# Altium PCB RF Waveform Generator Layout.PcbDoc
Units mil, origin at the board's own origin, x right, y up, seen from the top; angles counter-clockwise.
Board outline 6000 x 4000 mil, 2 copper layers (Top Layer, Bottom Layer); 109 components, 67 nets, 443 pads, 0 vias.
Unrouted connection lines stored in the file: 226.
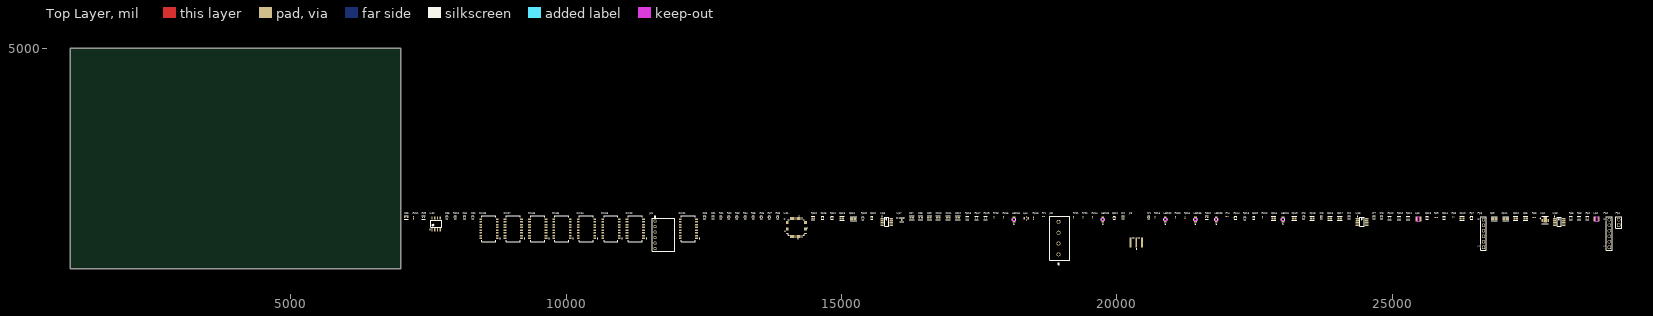
[diagram p0: Top Layer view]
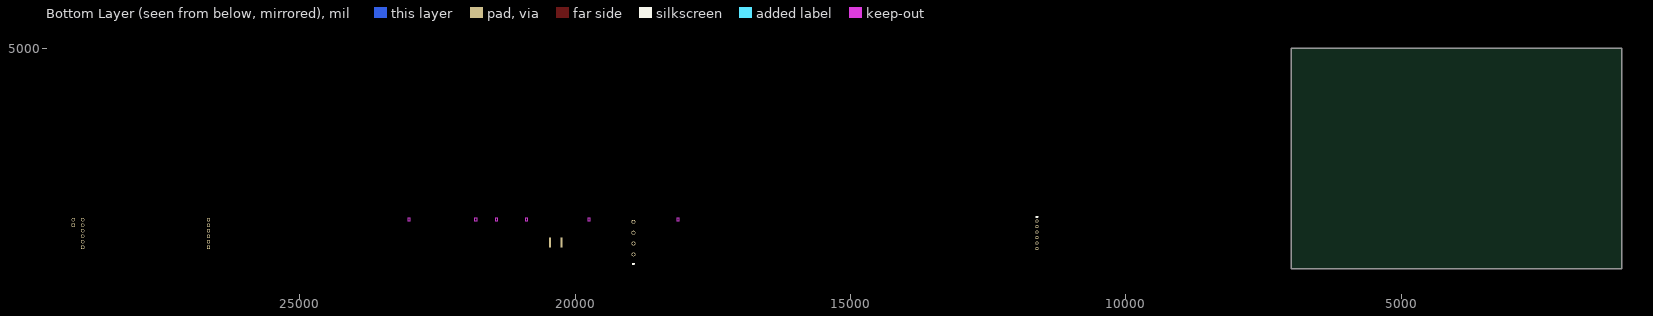
[diagram p1: Bottom Layer view, seen from below]

## Layer stack, top to bottom
Top Solder: solder mask 0.4, Solder Resist, Dk 3.5
Top Layer: signal copper 1.4
Dielectric 1: dielectric 12.6, FR-4, Dk 4.8
Bottom Layer: signal copper 1.4
Bottom Solder: solder mask 0.4, Solder Resist, Dk 3.5

## Board outline
1000,1000 7000,1000 7000,5000 1000,5000

## Design rules (kind name [scope] priority, off if disabled: settings)
Clearance [All] p1: gap=10 ignorepadtopadclearanceinfootprint=FALSE
PolygonConnect [All] p1: connectstyle=Relief reliefconductorwidth=10 reliefentries=4 polygonreliefangle="90 Angle" airgapwidth=10
RoutingVias [All] p1: holewidth=28 width=50 viastyle="Through Hole" minholewidth=28 minwidth=50 maxholewidth=28 maxwidth=50
SolderMaskExpansion [All] p1: expansion=4 istentingtop=FALSE
SupplyNets "Schematic Supply Nets_5" [InNet('Vopamp')] p1: voltage=0.000
SupplyNets "Schematic Supply Nets_4" [InNet('Vdigital')] p2: voltage=0.000
SupplyNets "Schematic Supply Nets_3" [InNet('Vout')] p3: voltage=0.000
SupplyNets "Schematic Supply Nets_2" [InNet('VCC')] p4: voltage=0.000
SupplyNets "Schematic Supply Nets_1" [InNet('+20')] p5: voltage=0.000
SupplyNets "Schematic Supply Nets" [InNet('GND')] p6: voltage=0.000
Width [All] p1: maxlimit=10 minlimit=10 preferedwidth=10
30 further rules are at their usual default settings.

## Components (designator, comment, footprint, x,y, rotation, side; value= is the part's Value field where it differs from the comment)
Cd1 "0.1uF" FP-CC0402-MFG 12665,1935 r0 top value="100 nF"
Cd2 "0.1uF" FP-CC0402-MFG 8305,1935 r0 top value="100 nF"
Cd3 "0.1uF" FP-CC0402-MFG 12515,1935 r0 top value="100 nF"
Cd4 "0.1uF" FP-CC0402-MFG 8155,1935 r0 top value="100 nF"
Cd5 "0.1uF" FP-CC0402-MFG 7835,1935 r0 top value="100 nF"
Cd6 "1.5nF" FP-CGA3E-0_3-0_1-MFG 7100,1930 r0 top
Cd7 "4.7uF" FP-GRM188-0_2-IPC_C 16275,1925 r0 top
Cd8 "4.7uF" FP-GRM188-0_2-IPC_C 16435,1925 r0 top
Cd9 "4.7uF" FP-GRM188-0_2-IPC_C 16595,1925 r0 top
Cd10 "4.7uF" FP-GRM188-0_2-IPC_C 16755,1925 r0 top
Cd11 "4.7uF" FP-GRM188-0_2-IPC_C 16935,1925 r0 top
Cd12 "4.7uF" FP-GRM188-0_2-IPC_C 17110,1925 r0 top
Cp5 "10uF" FP-GRM188-0_2-IPC_C 27420,1915 r0 top
Cp9 "4.7 uF" FP-GRM188-0_2-IPC_A 26850,1910 r0 top
Cp10 "10uF" FP-GRM188-0_2-IPC_C 26265,1915 r0 top
Cp11 "4.7uF" FP-GRM188-0_2-IPC_A 27060,1910 r0 top
Cp12 "10uF" FP-GRM188-0_2-IPC_C 27240,1915 r0 top
Cp13 "CC0402KRX7R7BB102" FP-CC0402-MFG 25630,1925 r0 top value=1nF
Cp14 "CC0402KRX7R7BB104" FP-CC0402-MFG 25940,1925 r0 top value="100 nF"
Cp15 "10uF" FP-GRM188-0_2-IPC_C 22845,1915 r0 top
Cp16 "10uF" FP-GRM188-0_2-IPC_C 23865,1915 r0 top
Cp17 "10uF" FP-GRM188-0_2-IPC_C 24045,1915 r0 top
Cp18 "10uF" FP-GRM188-0_2-IPC_C 23545,1915 r0 top
Cp19 "10uF" FP-GRM188-0_2-IPC_C 23220,1915 r0 top
Cp20 "C0402C103K4RACTU" FP-C0402-BB-MFG 22485,1925 r0 top value="10 nH"
Cp21 "CC0402KRX7R7BB104" FP-CC0402-MFG 19950,1925 r0 top value="100 nF"
Cp22 "GRM155R61C225ME44D" FP-GRM155-0_1-MFG 15550,1925 r0 top
Cp23 "10uF" FP-GRM188-0_2-IPC_C 15005,1915 r0 top
Cp24 "4.7uF" FP-GRM188-0_2-IPC_A 15215,1910 r0 top
Cp25 "CC0402KRX7R7BB104" FP-CC0402-MFG 14655,1925 r0 top value="100 nF"
Cr1 "100pF" FP-C0402-BB-MFG 20575,1935 r0 top value="100 pF"
Cr2 "100pF" FP-C0402-BB-MFG 20110,1935 r0 top value="100 pF"
Cr3 "1000pF" FP-CC0402-MFG 23390,1935 r0 top value="1.0 nF"
Cr4 "1uF" FP-CC0402-MFG 24215,1935 r0 top value="1 uF"
Cr6 "100pF" FP-C0402-BB-MFG 23710,1935 r0 top value="100 pF"
Cr7 "1000pF" FP-CC0402-MFG 24665,1935 r0 top value="1.0 nF"
Cr8 "1uF" FP-CC0402-MFG 24805,1935 r0 top value="1 uF"
Jd1 "22052061" CONN_22-05-2061_MOL 11615,1865 r90 top
Jd2 "1935187" CONN_1935187_PXC 18940,1260 r90 top
Jr3 "EMPCB.SMAFSTJ.B.HT" FP-EMPCB_SMAFSTJ_B_HT-MFG 20350,1750 r0 top
LEDd1 "XZCDGK54W-1VF" LED_XZCDGK54W-1VF_SLD 23015,1895 r90 top
LEDd2 "XZCDGK54W-1VF" LED_XZCDGK54W-1VF_SLD 20880,1895 r90 top
LEDd3 "XZCDGK54W-1VF" LED_XZCDGK54W-1VF_SLD 19745,1895 r90 top
LEDd4 "XZCDGK54W-1VF" LED_XZCDGK54W-1VF_SLD 18130,1895 r90 top
LEDd5 "XZCDGK54W-1VF" LED_XZCDGK54W-1VF_SLD 21425,1895 r90 top
LEDd6 "XZCDGK54W-1VF" LED_XZCDGK54W-1VF_SLD 21805,1895 r90 top
Lp2 "74438323010" WE-MAPI_2510 28710,1900 r0 top
Lp3 "74438323010" WE-MAPI_2510 25475,1900 r0 top
Lp4 "MLZ2012N100LT000" FP-MLZ2012-1_25-MFG 18355,1915 r0 top
Pp1 "61300211121" 61300211121 29110,1840 r90 top
Pp2 "61300611121" 61300611121 28940,1640 r90 top
Pp3 "61300611121" 61300611121 26655,1640 r90 top
Rd1 "AC0402FR-0710KL" FP-AC0402-MFG 12810,1935 r0 top
Rd2 "AC0402FR-0710KL" FP-AC0402-MFG 12955,1935 r0 top
Rd3 "AC0402FR-0710KL" FP-AC0402-MFG 13100,1935 r0 top
Rd4 "AC0402FR-0710KL" FP-AC0402-MFG 13250,1935 r0 top
Rd5 "AC0402FR-0710KL" FP-AC0402-MFG 13395,1935 r0 top
Rd6 "AC0402FR-0710KL" FP-AC0402-MFG 13545,1935 r0 top
Rd7 "AC0402FR-0710KL" FP-AC0402-MFG 13690,1935 r0 top
Rd8 "10kΩ" FP-AC0402-MFG 13840,1935 r0 top
Rd9 "2kΩ" FP-RC_L0402-MFG 7410,1930 r0 top
Rd10 "10kΩ" FP-AC0402-MFG 7985,1935 r0 top
Rd11 "5.23kΩ" RESC1005X40X25NL05T10 7230,1925 r90 top
Rd12 "300Ω" RESC1005X40X25LL05T10 22640,1935 r90 top
Rd13 "300Ω" RESC1005X40X25LL05T10 20690,1935 r90 top
Rd14 "300Ω" RESC1005X40X25LL05T10 19555,1935 r90 top
Rd15 "300Ω" RESC1005X40X25LL05T10 17940,1935 r90 top
Rd22 "2kΩ" FP-RC_L0402-MFG 21630,1930 r0 top
Rd23 "300Ω" RESC1005X40X25LL05T10 21060,1935 r90 top
Rp2 "RC0402FR-072KL" FP-RC_L0402-MFG 28540,1920 r0 top value=2kΩ
Rp3 "RC0402FR-072KL" FP-RC_L0402-MFG 28390,1920 r0 top value=2kΩ
Rp5 "RC0402FR-072KL" FP-RC_L0402-MFG 28240,1920 r0 top value=2kΩ
Rp6 "7.15kΩ" RESC1005X40X25ML05T10 27575,1930 r0 top
Rp7 "PE0402JRF070R02L" FP-PE0402-0_5-MFG 26435,1925 r0 top
Rp8 "4.75kΩ" RESC1005X40X25LL05T10 26105,1935 r0 top
Rp9 "4.12kΩ" RESC1005X40X25ML05T10 25800,1930 r0 top
Rp10 "RC0402FR-072KL" FP-RC_L0402-MFG 25120,1920 r0 top value=2kΩ
Rp11 "RC0402FR-072KL" FP-RC_L0402-MFG 25285,1920 r0 top value=2kΩ
Rp12 "RC0402FR-072KL" FP-RC_L0402-MFG 24950,1920 r0 top value=2kΩ
Rp13 "RT0402CRD0747K5L" FP-RT0402-MFG 22320,1920 r0 top value=47.5KΩ
Rp14 "PE0402JRF070R02L" FP-PE0402-0_5-MFG 22150,1925 r0 top
Rp15 "4.75kΩ" RESC1005X40X25LL05T10 21235,1925 r90 top
Rp16 "15kΩ" RESC1005X40X25NL05T10 18485,1915 r90 top
Rp17 "RC0402FR-072KL" FP-RC_L0402-MFG 17450,1920 r0 top value=2kΩ
Rp18 "RC0402FR-072KL" FP-RC_L0402-MFG 17280,1920 r0 top value=2kΩ
Rp19 "RC0402FR-072KL" FP-RC_L0402-MFG 17615,1920 r0 top value=2kΩ
Rp20 "RT0402DRE0718K2L" FP-RT0402-MFG 15385,1920 r0 top value=18.2kΩ
Rp21 "PE0402JRF070R02L" FP-PE0402-0_5-MFG 14825,1925 r0 top
Rp22 "RC0402FR-071KL" FP-RC0402-0_4-IPC_A 14485,1920 r0 top
Rr1 "20kΩ" RESC1005X40X25NL05T10 18670,1945 r0 top
Rr01 "15Ω" RESC1005X40X25LL05T10 19215,1935 r90 top
Rr02 "15Ω" RESC1005X40X25LL05T10 19380,1935 r90 top
Rr03 "8.2Ω" RESC1005X40X25LL05T10 17765,1935 r90 top
Rr4 "3kΩ" RESC1005X40X25LL10T10 22000,1945 r0 top
SWd1 "1-1571983-1" FP-1-1571983-1-MFG 12220,1725 r90 top
SWd2 "1-1571983-1" FP-1-1571983-1-MFG 11255,1725 r90 top
SWd3 "1-1571983-1" FP-1-1571983-1-MFG 10815,1725 r90 top
SWd4 "1-1571983-1" FP-1-1571983-1-MFG 10370,1725 r90 top
SWd5 "1-1571983-1" FP-1-1571983-1-MFG 9925,1725 r90 top
SWd6 "1-1571983-1" FP-1-1571983-1-MFG 9485,1725 r90 top
SWd7 "1-1571983-1" FP-1-1571983-1-MFG 9040,1725 r90 top
SWd8 "1-1571983-1" FP-1-1571983-1-MFG 8600,1725 r90 top
Ud1 "PIC32MK0128MCA048-IY8X" TQFP48_Y8X_MCH 14180,1750 r0 top
Ud2 "OPA209AID" D0008A_N 7640,1815 r90 top
Up2 "ADM7170ACPZ-R7" FP-CP-8-21-IPC_C 27775,1885 r0 top
Up3 "LTC2945CMS#TRPBF" LT-MS-12_N 28030,1850 r0 top
Up6 "LTC2945CMS#TRPBF" LT-MS-12_N 24450,1850 r0 top
Up7 "MIC2290YML-TR" FP-DFN22-8LD-PL-1-IPC_A 16095,1890 r0 top
Up8 "LTC2945CMS#TRPBF" LT-MS-12_N 15820,1850 r0 top

## Footprints (in the part's own frame and the unit in brackets; to place one, negate y for a bottom-side part, rotate by r counter-clockwise, add the part's x,y. Pads: shape width x height; smd on the part's side, far side on the other; paste and mask are expansions set on the pad)
61300211121 [mm] "Pin Header, pitch 2.54 mm, THT, Vertical, single row, 2p"
  rrect50% 1.6x1.6 hole 1.1: 1(-1.27,0)
  round 1.6 hole 1.1: 2(1.27,0)
  silkscreen extent -2.69,-1.35 2.69,1.35, body extent -2.54,-1.27 2.54,1.27, height 8.57
61300611121 [mm] "Pin Header, pitch 2.54 mm, THT, Vertical, single row, 6p"
  rrect50% 1.6x1.6 hole 1.1: 1(-6.35,0)
  round 1.6 hole 1.1: 2(-3.81,0) 3(-1.27,0) 4(1.27,0) 5(3.81,0) 6(6.35,0)
  silkscreen extent -7.77,-1.35 7.77,1.35, body extent -7.62,-1.27 7.62,1.27, height 8.57
CONN_22-05-2061_MOL [mil]
  round 60 hole 40 paste-99999 mask+0: 1(0,0) 2(-100,0) 3(-200,0) 4(-300,0) 5(-400,0) 6(-500,0)
  silkscreen extent -550,-361 90,51
CONN_1935187_PXC [mil]
  round 71 / inner round 60 / far side round 71 hole 51 paste-99999 mask+0: 1(0,0) 2(196.85,0) 3(393.7,0) 4(590.55,0)
  silkscreen extent -188,-202 694,162
D0008A_N [mm] "SOIC, 8-Leads, Body 5x4mm, Pitch 1.27mm, IPC Medium Density"
  rrect17% 1.45x0.6 smd: 1(-2.725,1.905) 2(-2.725,0.635) 3(-2.725,-0.635) 4(-2.725,-1.905) 5(2.725,-1.905) 6(2.725,-0.635) 7(2.725,0.635) 8(2.725,1.905)
  silkscreen extent -2.85,-2.5 1.6,2.88, body extent -3,-2.45 3,2.45, height 1.63
FP-1-1571983-1-MFG [mm]
  rect 0.76x1.27 smd paste+0 mask+0: 1(-4.445,-3.795) 2(-3.175,-3.795) 3(-1.905,-3.795) 4(-0.635,-3.795) 5(0.635,-3.795) 6(1.905,-3.795) 7(3.175,-3.795) 8(4.445,-3.795) 9(4.445,3.795) 10(3.175,3.795) 11(1.905,3.795) 12(0.635,3.795) 13(-0.635,3.795) 14(-1.905,3.795) 15(-3.175,3.795) 16(-4.445,3.795)
  silkscreen extent -5.89,-5.22 5.89,3.22, body extent -5.99,-4.53 5.99,4.53, height 0.25
FP-AC0402-MFG [mm]
  rect 0.5x0.6 smd paste+0 mask+0: 1(-0.5,0) 2(0.5,0)
  silkscreen extent -0.5,-0.67 0.5,0.67, body extent -0.85,-0.4 0.85,0.4, height 0.25
FP-C0402-BB-MFG [mm]
  rect 0.52x0.52 smd paste+0 mask+0: 1(-0.4,0) 2(0.4,0)
  silkscreen extent -0.5,-0.64 0.5,0.64, body extent -0.8,-0.4 0.8,0.4, height 0.25
FP-CC0402-MFG [mm]
  rect 0.5x0.5 smd paste+0 mask+0: 1(-0.5,0) 2(0.5,0)
  silkscreen extent -0.53,-0.68 0.53,0.67, body extent -0.87,-0.48 0.87,0.48, height 0.25
FP-CGA3E-0_3-0_1-MFG [mm]
  rect 0.7x0.7 smd paste+0 mask+0: 1(-0.7,0) 2(0.7,0)
  silkscreen extent -0.95,-0.72 0.95,0.72, body extent -1.15,-0.65 1.15,0.65, height 0.25
FP-CP-8-21-IPC_C [mm]
  rect 0.756x0.242 smd paste+0 mask+0: 1(-1.378,0.75)
  rrect100% 0.756x0.242 smd paste+0 mask+0: 2(-1.378,0.25) 3(-1.378,-0.25) 4(-1.378,-0.75) 5(1.378,-0.75) 6(1.378,-0.25) 7(1.378,0.25) 8(1.378,0.75)
  rect 1.7x2.54 smd paste-1000 mask+0: 9(0,0)
  silkscreen extent -2.37,-1.65 1.5,1.65, body extent -1.86,-1.6 1.86,1.6, height 0.25
FP-DFN22-8LD-PL-1-IPC_A [mm]
  rect 0.844x0.242 smd paste+0 mask+0: 1(-1.014,0.75)
  rrect100% 0.844x0.242 smd paste+0 mask+0: 2(-1.014,0.25) 3(-1.014,-0.25) 4(-1.014,-0.75) 5(1.014,-0.75) 6(1.014,-0.25) 7(1.014,0.25) 8(1.014,0.75)
  rect 0.7x1.3 smd paste-1000 mask+0: 9(0,0)
  silkscreen extent -2.36,-1 1,1, body extent -1.94,-1.5 1.94,1.5, height 0.25
FP-EMPCB_SMAFSTJ_B_HT-MFG [mm]
  rect 0.85x4.56 smd paste+0 mask+0: 1(0,-7.03)
  rect 1x4.56 smd paste+0 mask+0: 2(-2.62,-7.03) 3(2.62,-7.03)
  rect 1x4.56 smd far side paste+0 mask+0: 4(-2.62,-7.03) 5(2.62,-7.03)
  silkscreen extent -1.75,-10.17 1.75,-4.75, body extent -3.32,-9.41 3.32,5.35, height 0.25
FP-GRM155-0_1-MFG [mm]
  rect 0.4x0.5 smd paste+0 mask+0: 1(-0.4,0) 2(0.4,0)
  silkscreen extent -0.53,-0.65 0.53,0.65, body extent -0.7,-0.38 0.7,0.38, height 0.25
FP-GRM188-0_2-IPC_A [mil]
  rect 51.38x43.55 smd paste+0 mask+0: 1(-31.52,0) 2(31.52,0)
  silkscreen extent -57,-38 57,38, body extent -77,-41 77,41, height 10
FP-GRM188-0_2-IPC_C [mil]
  rect 35.63x35.68 smd paste+0 mask+0: 1(-23.64,0) 2(23.64,0)
  silkscreen extent -41,-35 41,35, body extent -45,-24 45,24, height 10
FP-MLZ2012-1_25-MFG [mm]
  rect 0.8x1.2 smd paste+0 mask+0: 1(-0.9,0) 2(0.9,0)
  silkscreen extent -0.13,-0.72 0.13,0.72, body extent -1.4,-0.82 1.4,0.82, height 0.25
FP-PE0402-0_5-MFG [mm]
  rect 0.5x0.6 smd paste+0 mask+0: 1(-0.5,0) 2(0.5,0)
  silkscreen extent -0.55,-0.67 0.55,0.67, body extent -0.85,-0.4 0.85,0.4, height 0.25
FP-RC0402-0_4-IPC_A [mil]
  rect 28.16x26.48 smd paste+0 mask+0: 1(-18.84,0) 2(18.84,0)
  silkscreen extent -33,-29 33,29, body extent -41,-21 41,21, height 10
FP-RC_L0402-MFG [mm]
  rect 0.5x0.6 smd paste+0 mask+0: 1(-0.5,0) 2(0.5,0)
  silkscreen extent -0.74,-0.74 0.74,0.74, body extent -0.85,-0.4 0.85,0.4, height 0.25
FP-RT0402-MFG [mm]
  rect 0.5x0.6 smd paste+0 mask+0: 1(-0.5,0) 2(0.5,0)
  silkscreen extent -0.5,-0.71 0.5,0.7, body extent -0.85,-0.4 0.85,0.4, height 0.25
LED_XZCDGK54W-1VF_SLD [mil]
  rect 30x49 smd paste+0 mask+0: 1(-38.5,0) 2(38.5,0)
  Top Layer keep-out region: -21.5,-22.5 -21.5,22.5 21.5,22.5 21.5,-22.5
  Keep-Out Layer region: -21.5,-24.5 -21.5,24.5 21.5,24.5 21.5,-24.5
  silkscreen extent -89,-30 11,30, body extent -39,-24 39,24, height 30
LT-MS-12_N [mm] "SOP, 12-Leads, Body 4.1x3.1mm, Pitch 0.65mm, IPC Medium Density"
  oval 1.6x0.45 smd: 1(-2.15,1.625) 2(-2.15,0.975) 3(-2.15,0.325) 4(-2.15,-0.325) 5(-2.15,-0.975) 6(-2.15,-1.625) 7(2.15,-1.625) 8(2.15,-0.975) 9(2.15,-0.325) 10(2.15,0.325) 11(2.15,0.975) 12(2.15,1.625)
  silkscreen extent -2.27,-2.05 0.95,2.52, body extent -1.55,-2.05 1.55,2.05, height 1.1
RESC1005X40X25LL05T10 [mm] "Chip Resistor, 2-Leads, Body 1.00x0.50mm, IPC High Density"
  rect 0.5x0.45 smd: 1(-0.375,0) 2(0.375,0)
  body extent -0.53,-0.27 0.53,0.28, height 0.4
RESC1005X40X25LL10T10 [mm] "Chip Resistor, 2-Leads, Body 1.00x0.50mm, IPC High Density"
  rect 0.55x0.5 smd: 1(-0.375,0) 2(0.375,0)
  body extent -0.55,-0.3 0.55,0.3, height 0.4
RESC1005X40X25ML05T10 [mm] "Chip Resistor, 2-Leads, Body 1.00x0.50mm, IPC Low Density"
  rect 0.7x0.65 smd: 1(-0.475,0) 2(0.475,0)
  body extent -0.53,-0.27 0.53,0.28, height 0.4
RESC1005X40X25NL05T10 [mm] "Chip Resistor, 2-Leads, Body 1.00x0.50mm, IPC Medium Density"
  rect 0.6x0.55 smd: 1(-0.425,0) 2(0.425,0)
  body extent -0.53,-0.27 0.53,0.28, height 0.4
TQFP48_Y8X_MCH [mil]
  rect 53x11 smd paste+0 mask+0: 1(-164.5,108.27) 2(-164.5,88.58) 3(-164.5,68.9) 4(-164.5,49.21) 5(-164.5,29.53) 6(-164.5,9.84) 7(-164.5,-9.84) 8(-164.5,-29.53) 9(-164.5,-49.21) 10(-164.5,-68.9) 11(-164.5,-88.58) 12(-164.5,-108.27) 25(164.5,-108.27) 26(164.5,-88.58) 27(164.5,-68.9) 28(164.5,-49.21) 29(164.5,-29.53) 30(164.5,-9.84) 31(164.5,9.84) 32(164.5,29.53) 33(164.5,49.21) 34(164.5,68.9) 35(164.5,88.58) 36(164.5,108.27)
  rect 11x53 smd paste+0 mask+0: 13(-108.27,-164.5) 14(-88.58,-164.5) 15(-68.9,-164.5) 16(-49.21,-164.5) 17(-29.53,-164.5) 18(-9.84,-164.5) 19(9.84,-164.5) 20(29.53,-164.5) 21(49.21,-164.5) 22(68.9,-164.5) 23(88.58,-164.5) 24(108.27,-164.5) 37(108.27,164.5) 38(88.58,164.5) 39(68.9,164.5) 40(49.21,164.5) 41(29.53,164.5) 42(9.84,164.5) 43(-9.84,164.5) 44(-29.53,164.5) 45(-49.21,164.5) 46(-68.9,164.5) 47(-88.58,164.5) 48(-108.27,164.5)
  silkscreen extent -211,-211 211,211, body extent -177,-177 177,177, height 47
WE-MAPI_2510 [mm] "SMT Shielded Power Inductor, body 2..5x2mm"
  rect 0.85x2.3 smd: 1(-0.975,0) 2(0.975,0)
  Top Layer keep-out region: -0.45,1.15 0.45,1.15 0.45,-1.15 -0.45,-1.15
  body extent -1.25,-1 1.25,1, height 1

## Part data
Cd1 Cd2 Cd3 Cd4 Cd5: library part CMP-03422-000048-1, "CC0402KRX7R7BB104, CAP CER 0.1UF 16V X7R 0402", Capacitance="100 nF", Manufacturer=YAGEO, Manufacturer Part Number=CC0402KRX7R7BB104, Package=CC0402, Temperature="-55°C to +125°C", Temperature Characteristic=X7R, Temperature Coefficient=30ppm/°C, Temperature Range High=+125°C, Temperature Range Low=-55°C, Tolerance=0.1, Voltage Rating="16 V", Automotive=No, Automotive Grade=NA, Category=Cap, ComponentLink2Description=Datasheet, ComponentLink2URL=http://www.yageo.com/documents/recent/UPY-GP_NP0_16V-to-50V_16.pdf, Device Class L1="Passive Components", Device Class L2=Capacitors, Device Class L3="Ceramic Capacitors", Digikey Description="CAP CER 0.1UF 16V X7R 0402", Footprint Url=http://www.yageo.com/exep/pages/download/literatures/UPY-C_GEN_24.pdf, Height=0.55mm, Ipc Land Pattern Name=CAPC10050X50, Lead Free=Yes, Material=Ceramic, Mouser Description="0402 0.1 uF 16 V ±10 % Tolerance X7R SMT Multilayer Ceramic Capacitor", Octopart=https://octopart.com/cc0402krx7r7bb104-yageo-42244624, RoHS=TRUE
Cd6: library part CMP-08246-001593-1, "CGA3E2X5R1H152K080AA / Cap Ceramic 1.5nF 50V X5R 10% Pad SMD 0603 +85°C Automotive T/R", Case Code (Imperial)=0603, Case Code (Metric)=1608, Dielectric=X5R, Max Operating Temperature=85°C, Min Operating Temperature=-55°C, Package Quantity=4000, Ratings=AEC-Q200, Tolerance=10%, Voltage Rating=50V, Capacitance=1.5nF, Case/Package=0603, Height=0.8mm, Length=0.063inch, Mount="Surface Mount", Packaging="Tape and Reel", Termination=SMD/SMT, Thickness=0.035inch, Voltage Rating (DC)=50V, Weight=7.1E-05oz, Width=0.031inch
Cd7 Cd8 Cd9 Cd10 Cd11 Cd12: library part CMP-2006-02545-2, "Chip Multilayer Ceramic Capacitors for General Purpose, 0603, 4.7uF, X5R, 15%, 10%, 35V", Case Code (Imperial)=0603, Case Code (Metric)=1608, Dielectric=X5R, Max Operating Temperature=85°C, Min Operating Temperature=-55°C, Package Quantity=4000, Resistor Type=Ceramic, Tolerance=10%, Voltage=35V, Capacitance=4.7uF, Case/Package=0603, Depth=0.8mm, Height=0.8mm, Lead Free="Lead Free", Length=1.6mm, Material=Ceramic, Mount="Surface Mount", Packaging="Tape and Reel", REACH SVHC="No SVHC", Termination=SMD/SMT, Thickness=0.031inch, Voltage Rating=35V, Voltage Rating (DC)=35V, Weight=0.000222oz, Width=0.8mm
Cp5 Cp10 Cp12 Cp15 Cp16 Cp17 Cp18 Cp19 Cp23: library part CMP-06035-000049-2, "Chip Multilayer Ceramic Capacitors for General Purpose, 0603, 10uF, X7R, 15%, 10%, 10V"
Cp9 Cp11 Cp24: library part CMP-06035-045467-1, "Chip Multilayer Ceramic Capacitors for General Purpose, 0603, 4.7uF, X7R, 15%, 10%, 16V"
Cp13: library part CMP-2000-06070-2, "CAP CER 1000PF 16V X7R 0402", Capacitance="1.0 nF", Manufacturer=YAGEO, Package=CC0402, Temperature="-55°C to +125°C", Temperature Characteristic=X7R, Temperature Coefficient=30ppm/°C, Temperature Range High=+125°C, Temperature Range Low=-55°C, Tolerance=0.1, Voltage Rating="16 V", Automotive=No, Automotive Grade=NA, Category=Cap, ComponentLink2Description=Datasheet, ComponentLink2URL=http://www.yageo.com/documents/recent/UPY-GP_NP0_16V-to-50V_16.pdf, Device Class L1="Passive Components", Device Class L2=Capacitors, Device Class L3="Ceramic Capacitors", Digikey Description="CAP CER 1000PF 16V X7R 0402", Footprint Url=http://www.yageo.com/exep/pages/download/literatures/UPY-C_GEN_24.pdf, Height=0.55mm, Ipc Land Pattern Name=CAPC10050X50, Lead Free=Yes, Manufacturer Part Number=CC0402KRX7R7BB102, Material=Ceramic, Mouser Description="0402 1 nF 16 V ±10 % Tolerance X7R SMT Multilayer Ceramic Capacitor", Octopart=https://octopart.com/cc0402krx7r7bb102-yageo-11543552, RoHS=TRUE
Cp14 Cp21: library part CMP-03422-000048-1, "CAP CER 0.1UF 16V X7R 0402", Capacitance=100nF, Manufacturer=YAGEO, Package=CC0402, Temperature="-55°C to +125°C", Temperature Characteristic=X7R, Temperature Coefficient=30ppm/°C, Temperature Range High=+125°C, Temperature Range Low=-55°C, Tolerance=0.1, Voltage Rating="16 V", Automotive=No, Automotive Grade=NA, Category=Cap, ComponentLink2Description=Datasheet, ComponentLink2URL=http://www.yageo.com/documents/recent/UPY-GP_NP0_16V-to-50V_16.pdf, Device Class L1="Passive Components", Device Class L2=Capacitors, Device Class L3="Ceramic Capacitors", Digikey Description="CAP CER 0.1UF 16V X7R 0402", Footprint Url=http://www.yageo.com/exep/pages/download/literatures/UPY-C_GEN_24.pdf, Height=0.55mm, Ipc Land Pattern Name=CAPC10050X50, Lead Free=Yes, Manufacturer Part Number=CC0402KRX7R7BB104, Material=Ceramic, Mouser Description="0402 0.1 uF 16 V ±10 % Tolerance X7R SMT Multilayer Ceramic Capacitor", Octopart=https://octopart.com/cc0402krx7r7bb104-yageo-42244624, RoHS=TRUE
Cp20: library part CMP-2008-03072-2, "CAP CER 10000PF 16V X7R 0402", Capacitance="10,000 pF", Manufacturer=Kemet, Package=C0402-BB, Temperature="-55°C to +125°C", Temperature Characteristic=X7R, Temperature Coefficient=15%, Temperature Range High=+125°C, Temperature Range Low=-55°C, Tolerance=0.1, Voltage Rating="16 V", Automotive=No, Category=Cap, ComponentLink2Description=Datasheet, ComponentLink2URL=https://content.kemet.com/datasheets/KEM_C1002_X7R_SMD.pdf, Device Class L1="Passive Components", Device Class L2=Capacitors, Device Class L3="Ceramic Capacitors", Digikey Description="CAP CER 10000PF 16V X7R 0402", Height=0.55mm, Ipc Land Pattern Name=CAPC10050X50, Lead Free=Yes, Manufacturer Part Number=C0402C103K4RACTU, Material=Ceramic, Mouser Description="Capacitor; Ceramic; Cap; .010uF; Tol 10%; SMT; Vol-Rtg 16V; X7R; Tape and Reel", Octopart=https://octopart.com/c0402c103k4ractu-kemet-130896, RoHS=TRUE
Cp22: library part CMP-06035-058929-1, "Chip Multilayer Ceramic Capacitors for General Purpose, 0402, 2.2uF, X5R, 15%, 20%, 16V", Capacitance=2.2uF, Case Code (Imperial)=0402, Case Code (Metric)=1005, Dielectric=X5R, Max Operating Temperature=85°C, Min Operating Temperature=-55°C, Package Quantity=10000, Tolerance=20%, Voltage Rating=16V, Case/Package=0402, Height=0.5mm, Length=0.039inch, Mount="Surface Mount", Packaging="Tape and Reel", Termination=SMD/SMT, Thickness=0.024inch, Voltage Rating (DC)=16V, Weight=0.000212oz, Width=0.02inch
Cp25: library part CMP-03422-000048-1, "CAP CER 0.1UF 16V X7R 0402", Capacitance="100 nF", Manufacturer=YAGEO, Package=CC0402, Temperature="-55°C to +125°C", Temperature Characteristic=X7R, Temperature Coefficient=30ppm/°C, Temperature Range High=+125°C, Temperature Range Low=-55°C, Tolerance=0.1, Voltage Rating="16 V", Automotive=No, Automotive Grade=NA, Category=Cap, ComponentLink2Description=Datasheet, ComponentLink2URL=http://www.yageo.com/documents/recent/UPY-GP_NP0_16V-to-50V_16.pdf, Device Class L1="Passive Components", Device Class L2=Capacitors, Device Class L3="Ceramic Capacitors", Digikey Description="CAP CER 0.1UF 16V X7R 0402", Footprint Url=http://www.yageo.com/exep/pages/download/literatures/UPY-C_GEN_24.pdf, Height=0.55mm, Ipc Land Pattern Name=CAPC10050X50, Lead Free=Yes, Manufacturer Part Number=CC0402KRX7R7BB104, Material=Ceramic, Mouser Description="0402 0.1 uF 16 V ±10 % Tolerance X7R SMT Multilayer Ceramic Capacitor", Octopart=https://octopart.com/cc0402krx7r7bb104-yageo-42244624, RoHS=TRUE
Cr1 Cr2 Cr6: library part CMP-2008-03284-2, "C0402C101J5GACTU, CAP CER 100PF 50V C0G/NP0 0402", Capacitance="100 pF", Manufacturer=Kemet, Manufacturer Part Number=C0402C101J5GACTU, Package=C0402-BB, Temperature="-55°C to +125°C", Temperature Characteristic=C0G, Temperature Coefficient=15%, Temperature Range High=+125°C, Temperature Range Low=-55°C, Tolerance=0.05, Voltage Rating="50 V", Automotive=No, Category=Cap, ComponentLink2Description=Datasheet, ComponentLink2URL=https://content.kemet.com/datasheets/KEM_C1002_X7R_SMD.pdf, Device Class L1="Passive Components", Device Class L2=Capacitors, Device Class L3="Ceramic Capacitors", Digikey Description="CAP CER 100PF 50V C0G/NP0 0402", Height=0.55mm, Ipc Land Pattern Name=CAPC10050X50, Lead Free=Yes, Material=Ceramic, Mouser Description="Multilayer Ceramic Capacitors MLCC - SMD/SMT 50volts 100pF C0G 5%", Octopart=https://octopart.com/c0402c101j5gactu-kemet-132471, RoHS=TRUE
Cr3 Cr7: library part CMP-2000-06070-2, "CC0402KRX7R7BB102, CAP CER 1000PF 16V X7R 0402", Capacitance="1.0 nF", Manufacturer=YAGEO, Manufacturer Part Number=CC0402KRX7R7BB102, Package=CC0402, Temperature="-55°C to +125°C", Temperature Characteristic=X7R, Temperature Coefficient=30ppm/°C, Temperature Range High=+125°C, Temperature Range Low=-55°C, Tolerance=0.1, Voltage Rating="16 V", Automotive=No, Automotive Grade=NA, Category=Cap, ComponentLink2Description=Datasheet, ComponentLink2URL=http://www.yageo.com/documents/recent/UPY-GP_NP0_16V-to-50V_16.pdf, Device Class L1="Passive Components", Device Class L2=Capacitors, Device Class L3="Ceramic Capacitors", Digikey Description="CAP CER 1000PF 16V X7R 0402", Footprint Url=http://www.yageo.com/exep/pages/download/literatures/UPY-C_GEN_24.pdf, Height=0.55mm, Ipc Land Pattern Name=CAPC10050X50, Lead Free=Yes, Material=Ceramic, Mouser Description="0402 1 nF 16 V ±10 % Tolerance X7R SMT Multilayer Ceramic Capacitor", Octopart=https://octopart.com/cc0402krx7r7bb102-yageo-11543552, RoHS=TRUE
Cr4 Cr8: library part CMP-03422-000489-1, "CC0402KRX5R6BB105, CAP CER 1UF 10V X5R 0402", Capacitance="1 uF", Manufacturer=YAGEO, Manufacturer Part Number=CC0402KRX5R6BB105, Package=CC0402, Temperature="-55°C to +125°C", Temperature Characteristic=X5R, Temperature Coefficient=30ppm/°C, Temperature Range High=+125°C, Temperature Range Low=-55°C, Tolerance=0.1, Voltage Rating="10 V", Automotive=No, Automotive Grade=NA, Category=Cap, ComponentLink2Description=Datasheet, ComponentLink2URL=http://www.yageo.com/documents/recent/UPY-GP_NP0_16V-to-50V_16.pdf, Device Class L1="Passive Components", Device Class L2=Capacitors, Device Class L3="Ceramic Capacitors", Digikey Description="CAP CER 1UF 10V X5R 0402", Footprint Url=http://www.yageo.com/exep/pages/download/literatures/UPY-C_GEN_24.pdf, Height=0.55mm, Ipc Land Pattern Name=CAPC10050X50, Lead Free=Yes, Material=Ceramic, Mouser Description="Multilayer Ceramic Capacitors MLCC - SMD/SMT 1uF 10V X5R 10%", Octopart=https://octopart.com/cc0402krx5r6bb105-yageo-42244620, RoHS=TRUE
Jd1: "No Description Available", Mfr_Name="Molex Connector Corporation", RefDes=RefDes, Type=Type
Jd2: "No Description Available", Mfr_Name="Phoenix Contact", RefDes=RefDes, Type=Type
Jr3: library part CMP-111093-000001-1, "CONN SMA JACK STR 50OHM EDGE MNT", Frequency=12.4GHz, Manufacturer="Taoglas Limited", Package=0, Temperature="-40°C to +85°C", Temperature Range High=+85°C, Temperature Range Low=-40°C, Voltage Rating=335V, Automotive=No, Category=Conn, ComponentLink2Description=Datasheet, ComponentLink2URL=https://cdn.taoglas.com/datasheets/EMPCB.SMAFSTJ.B.HT.pdf, Conn Orientation=Horizontal, Contact Material=Gold, Device Class L1=Connectors, Device Class L2="RF / Coaxial Connectors", Device Class L3=unset, Digikey Description="CONN SMA JACK STR 50OHM EDGE MNT", Impedance=50Ω, Is Female=yes, Lead Free=Yes, Manufacturer Part Number=EMPCB.SMAFSTJ.B.HT, Mouser Description="RF Connectors / Coaxial Connectors SMA Straight Edge Mount PCB Jack-Gold", Number Of Contacts=1, Octopart=https://octopart.com/empcb.smafstj.b.ht-taoglas-24204431, Pitch=2.62mm, RoHS=TRUE
LEDd1 LEDd2 LEDd3 LEDd4 LEDd5 LEDd6: "XZCDGK54W-1VF / LED GREEN CLEAR 0805 SMD", Mfr_Name=SunLED, Type="LED Indication"
Lp2 Lp3: library part CMP-1411-00009-3, Ambient Temperature Range High=85°C, Ambient Temperature Range Low=-40°C, Case Code (Imperial)=1008, Case Code (Metric)=2520, Current Rating=2.5A, DC Resistance (DCR)=63mΩ, Inductance=1µH, Inductance Tolerance=20%, Max Operating Temperature=125°C, Saturation Current=4A, Self Resonant Frequency=80MHz, Test Frequency=100kHz, Case/Package=1008, Core Material="Composite, Ferrite, Metal", Depth=2mm, Height=1mm, Height - Seated (Max)=990.6µm, Length=2.5mm, Max DC Current=2.5A, Min Operating Temperature=-40°C, Mount="Surface Mount", NexarPartId=30848142, Number of Pins=2, Packaging="Cut Tape (CT)", REACH SVHC=Unknown, RMS Current (Irms)=2.5A, RoHS=Compliant, Series Resistance=63mΩ, Shielding=Shielded, Termination=SMD/SMT, Tolerance=20%, Weight=32.006612mg, Width=2mm
Lp4: library part CMP-08253-000052-1, "Shielded Multilayer Inductor 10uH ±20% 500mA 390mΩ SMD 0805", Case Code (Imperial)=0805, Case Code (Metric)=2012, Current Rating=500mA, DC Resistance (DCR)=390mR, Inductance=10uH, Max Operating Temperature=125°C, Min Operating Temperature=-55°C, Package Quantity=1, Saturation Current=110mA, Self Resonant Frequency=50MHz, Test Frequency=2MHz, Tolerance=20%, Case/Package=0805, Core Material=Ferrite, Height - Seated (Max)=0.057inch, Length=0.079inch, Mount="Surface Mount", Packaging="Tape and Reel", RoHS Compliant=Yes, Shielding=Shielded, Width=0.049inch
Pp1: library part CMP-1712-00002-5, Color=Black, Contact Resistance=20mΩ, Current Rating=3A, Max Operating Temperature=125°C, Min Operating Temperature=-40°C, Operating Supply Voltage=250V, Connector Type="Male Pin", Contact Gender=Male, Contact Material=Copper, Contact Mating Length=5.9944mm, Contact Plating=Gold, Gender=Male, Height=8.94mm, Housing Material=PBT, Lead Free="Lead Free", Lead Pitch=2.54mm, Mount="Through Hole", NexarPartId=20081794, Number Of Contacts=2, Number of Pins=2, Number of Positions=2, Number of Rows=1, Orientation=Vertical, Packaging=Bulk, Pitch=2.54mm, REACH SVHC="No SVHC", RoHS=Compliant, Termination="Through Hole", Voltage Rating=250V
Pp2 Pp3: library part CMP-1502-01070-2, Color=Black, Contact Resistance=20mΩ, Current Rating=3A, Max Operating Temperature=105°C, Min Operating Temperature=-40°C, Operating Supply Voltage=250V, Connector Type="Male Pin", Contact Gender=Male, Contact Material=Copper, Contact Mating Length=5.9944mm, Contact Plating=Gold, Gender=Male, Height=8.89mm, Housing Material=PBT, Lead Free="Lead Free", Lead Pitch=2.54mm, Mount="Through Hole", NexarPartId=20084590, Number Of Contacts=6, Number of Pins=6, Number of Positions=6, Number of Rows=1, Orientation=Vertical, Packaging=Bulk, Pitch=2.54mm, REACH SVHC=Unknown, RoHS=Compliant, Termination="Through Hole", Voltage Rating=250V
Rd1 Rd2 Rd3 Rd4 Rd5 Rd6 Rd7: library part CMP-2002-01790-3, "RES 10kΩ ±1% 0.063W 0402", Case Code (Imperial)=0402, Case Code (Metric)=1005, Max Operating Temperature=155°C, Max Power Dissipation=63mW, Min Operating Temperature=-55°C, Power Rating=62.5mW, Resistance=10kR, Resistor Type="Thick Film", Temperature Coefficient=100ppm/°C, Tolerance=1%, Voltage Rating=50V, Case/Package=0402, Construction=Rectangular, Depth=0.5mm, Features="Moisture Resistant", Height=0.015inch, Lead Free="Lead Free", Length=0.039inch, Military Standard=Not, Number of Terminations=2, Packaging="Tape and Reel", RoHS Compliant=Yes, Series=AC, Size Code=0402, Termination=SMD/SMT, Width=0.02inch
Rd8 Rd10: library part CMP-2002-01790-3, "AC0402FR-0710KL, RES 10kΩ ±1% 0.063W 0402", Case Code (Imperial)=0402, Case Code (Metric)=1005, Max Operating Temperature=155°C, Max Power Dissipation=63mW, Min Operating Temperature=-55°C, Power Rating=62.5mW, Resistance=10kR, Resistor Type="Thick Film", Temperature Coefficient=100ppm/°C, Tolerance=1%, Voltage Rating=50V, Case/Package=0402, Construction=Rectangular, Depth=0.5mm, Features="Moisture Resistant", Height=0.015inch, Lead Free="Lead Free", Length=0.039inch, Military Standard=Not, Number of Terminations=2, Packaging="Tape and Reel", RoHS Compliant=Yes, Series=AC, Size Code=0402, Termination=SMD/SMT, Width=0.02inch
Rd9 Rd22: library part CMP-2002-07580-2, "RC0402FR-072KL, RES SMD 2K OHM 1% 1/16W 0402", Manufacturer=Yageo, Manufacturer Part Number=RC0402FR-072KL, Package=RC_L0402, Power Rating=0.0625W, Temperature="-55°C to +155°C", Temperature Coefficient=100ppm/°C, Temperature Range High=+155°C, Temperature Range Low=-55°C, Tolerance=1%, Voltage Rating=50V, Automotive=No, Category=Res, ComponentLink2Description=Datasheet, ComponentLink2URL=http://www.yageo.com/documents/recent/PYu-RC_Group_51_RoHS_L_9.pdf, Composition="Thick Film", Device Class L1="Passive Components", Device Class L2=Resistors, Device Class L3="Chip SMD Resistors", Digikey Description="RES SMD 2K OHM 1% 1/16W 0402", Footprint Url=https://www.yageo.com/upload/website/yageo_PYu-R_Mount_10_19050818_343.pdf, Height=0.4mm, Ipc Land Pattern Name=RESC10050X35, Lead Free=Yes, Mouser Description="RES SMD 2K OHM 1% 1/16W 0402", Octopart=https://octopart.com/rc0402fr-072kl-yageo-5032519, Resistance=2kΩ, RoHS=TRUE, Series=RC_L, Standoff Height=0mm
Rd11: library part CMP-2002-06960-1, "RC0402FR-075K23L", Manufacturer=Yageo, Part Number=RC0402FR-075K23L
Rd12 Rd23: library part CMP-2002-07009-1, "RC0402FR-07300RL", Manufacturer="Yageo / Phycomp", Part Number=RC0402FR-07300RL
Rd13 Rd14 Rd15: library part CMP-2002-07009-1, Manufacturer="Yageo / Phycomp", Part Number=RC0402FR-07300RL
Rp2 Rp3 Rp5 Rp10 Rp11 Rp12 Rp17 Rp18 Rp19: library part CMP-2002-07580-2, "RES SMD 2K OHM 1% 1/16W 0402", Manufacturer=Yageo, Package=RC_L0402, Power Rating=0.0625W, Resistance=2kΩ, Temperature="-55°C to +155°C", Temperature Coefficient=100ppm/°C, Temperature Range High=+155°C, Temperature Range Low=-55°C, Tolerance=1%, Voltage Rating=50V, Automotive=No, Category=Res, ComponentLink2Description=Datasheet, ComponentLink2URL=http://www.yageo.com/documents/recent/PYu-RC_Group_51_RoHS_L_9.pdf, Composition="Thick Film", Device Class L1="Passive Components", Device Class L2=Resistors, Device Class L3="Chip SMD Resistors", Digikey Description="RES SMD 2K OHM 1% 1/16W 0402", Footprint Url=https://www.yageo.com/upload/website/yageo_PYu-R_Mount_10_19050818_343.pdf, Height=0.4mm, Ipc Land Pattern Name=RESC10050X35, Lead Free=Yes, Manufacturer Part Number=RC0402FR-072KL, Mouser Description="RES SMD 2K OHM 1% 1/16W 0402", Octopart=https://octopart.com/rc0402fr-072kl-yageo-5032519, RoHS=TRUE, Series=RC_L, Standoff Height=0mm
Rp6: library part CMP-1011-00607-2, Manufacturer="Yageo / Phycomp", Part Number=RC0402FR-077K15L
Rp7 Rp14: library part CMP-03412-037831-1, "RES 0.02 OHM 5% 1/16W 0402", Case/Package=0402, Max Operating Temperature=125°C, Max Power Dissipation=63mW, Min Operating Temperature=-55°C, Resistance=20mR, Resistor Type="Metal Film", Temperature Coefficient=100ppm/°C, Tolerance=5%, Features="Moisture Resistant", Height=0.02inch, Length=0.039inch, Number of Terminations=2, Packaging="Tape and Reel", RoHS Compliant=Yes, Width=0.02inch
Rp8 Rp15: library part CMP-2002-07714-1, Manufacturer="Yageo / Phycomp", Part Number=RC0402FR-074K75L
Rp9: library part CMP-2002-07114-1, Manufacturer="Yageo / Phycomp", Part Number=RC0402FR-074K12L
Rp13: library part CMP-03412-005080-1, "RES SMD 47.5K OHM 1/16W 0402", Manufacturer=Yageo, Package=RT0402, Power Rating=0.063W, Resistance=47.5kΩ, Temperature="-55°C to +155°C", Temperature Coefficient="25 ppm/°C", Temperature Range High=+155°C, Temperature Range Low=-55°C, Tolerance=0.0025, Voltage Rating=50V, Automotive=No, Category=Res, ComponentLink2Description=Datasheet, ComponentLink2URL=http://www.yageo.com/documents/recent/PYu-RT_1-to-0.01_RoHS_L_9.pdf, Composition="Thin Film", Device Class L1="Passive Components", Device Class L2=Resistors, Device Class L3="Chip SMD Resistors", Digikey Description="RES SMD 47.5K OHM 1/16W 0402", Footprint Url=http://www.yageo.com/exep/pages/download/literatures/PYu-R_Mount_10.pdf, Height=0.35mm, Ipc Land Pattern Name=RESC10050X30, Lead Free=Yes, Manufacturer Part Number=RT0402CRD0747K5L, Octopart=https://octopart.com/rt0402crd0747k5l-yageo-1261837, RoHS=TRUE, Series=RT
Rp16: library part CMP-2002-07410-1, Manufacturer="Yageo / Phycomp", Part Number=RC0402FR0715KL
Rp20: library part CMP-03412-023673-1, "RES SMD 18.2K OHM 0.5% 1/16W", Manufacturer=Yageo, Package=RT0402, Power Rating=0.063W, Resistance=18.2KΩ, Temperature="-55°C to +155°C", Temperature Coefficient="50 ppm/°C", Temperature Range High=+155°C, Temperature Range Low=-55°C, Tolerance=0.005, Voltage Rating=50V, Automotive=No, Category=Res, ComponentLink2Description=Datasheet, ComponentLink2URL=http://www.yageo.com/documents/recent/PYu-RT_1-to-0.01_RoHS_L_9.pdf, Composition="Thin Film", Device Class L1="Passive Components", Device Class L2=Resistors, Device Class L3="Chip SMD Resistors", Digikey Description="RES SMD 18.2K OHM 0.5% 1/16W", Footprint Url=http://www.yageo.com/exep/pages/download/literatures/PYu-R_Mount_10.pdf, Height=0.35mm, Ipc Land Pattern Name=RESC10050X30, Lead Free=Yes, Manufacturer Part Number=RT0402DRE0718K2L, Mouser Description="Res Thin Film 0402 18.2K Ohm 0.5% 0.063W(1/16W) ±50ppm/C Epoxy Pad SMD T/R", Octopart=https://octopart.com/rt0402dre0718k2l-yageo-1187872, RoHS=TRUE, Series=RT
Rp21: library part CMP-03412-037831-1, "RES 0.02 OHM 5% 1/16W 0402", Case/Package=0402, Max Operating Temperature=125°C, Max Power Dissipation=63mW, Min Operating Temperature=-55°C, Resistance=20mΩ, Resistor Type="Metal Film", Temperature Coefficient=100ppm/°C, Tolerance=5%, Features="Moisture Resistant", Height=0.02inch, Length=0.039inch, Number of Terminations=2, Packaging="Tape and Reel", RoHS Compliant=Yes, Width=0.02inch
Rp22: library part CMP-2002-07472-3, "RES 1K OHM 1% 1/16W 0402", Case Code (Imperial)=0402, Case Code (Metric)=1005, Max Operating Temperature=155°C, Max Power Dissipation=63mW, Min Operating Temperature=-55°C, Power Rating=62.5mW, Resistance=1kΩ, Resistance Tolerance=1%, Resistor Type="Thick Film", Temperature Coefficient=100ppm/°C, Voltage Rating=50V, Case/Package=0402, Construction=Rectangular, Depth=0.5mm, Features="Moisture Resistant", Height=0.32mm, Lead Free="Lead Free", Length=1mm, Military Standard=Not, Number of Pins=2, Number of Terminations=2, Packaging="Tape and Reel", Reach SVHC Compliant=Yes, RoHS Compliant=Yes, Series=RC, Size Code=0402, Technology="THICK FILM", Termination=SMD/SMT, Tolerance=1%, Voltage Rating (DC)=50V, Width=0.5mm
Rr1: library part CMP-2002-07956-1, "RC0402JR-0720KL", Manufacturer="Yageo / Phycomp", Part Number=RC0402JR-0720KL
Rr01 Rr02: library part CMP-2002-07413-1, "RC0402FR-0715RL", Manufacturer="Yageo / Phycomp", Part Number=RC0402FR-0715RL
Rr03: library part CMP-2002-08051-1, "RC0402JR-078", Manufacturer="Yageo / Phycomp", Part Number=RC0402JR-0782RL
Rr4: library part CMP-2002-05599-1, "CR0402-JW-302GLF", Manufacturer=Bourns, Part Number=CR0402-JW-302GLF
SWd1 SWd2 SWd3 SWd4 SWd5 SWd6 SWd7 SWd8: library part CMP-03400-000003-1, "SWITCH SLIDE DIP SPST 25MA 24V", Contact Current Rating=25mA, Contact Resistance=100mΩ, Manufacturer="TE Connectivity", Temperature="-30°C to +85°C", Temperature Range High=+85°C, Temperature Range Low=-30°C, Voltage Rating Dc=50V, Automotive=No, Category=Switch, ComponentLink2Description=Datasheet, ComponentLink2URL=https://www.te.com/commerce/DocumentDelivery/DDEController?Action=showdoc&DocId=Catalog+Section%7F1308111-1_SWITCHES_CORE_PROGRAM_CATALOG%7F0308%7Fpdf%7FEnglish%7FENG_CS_1308111-1_SWITCHES_CORE_PROGRAM_CATALOG_0308.pdf%7F1-1571983-1, Device Class L1=Electromechanical, Device Class L2=Switches, Device Class L3="DIP Switches", Digikey Description="SWITCH SLIDE DIP SPST 25MA 24V", Electromechanical Life=1000Cycles, Footprint Url=https://www.te.com/commerce/DocumentDelivery/DDEController?Action=showdoc&DocId=Customer+Drawing%7F1571983%7FC6%7Fpdf%7FEnglish%7FENG_CD_1571983_C6.pdf%7F1-1571983-1, Height=2.56mm, Lead Free=Yes, Manufacturer Part Number=1-1571983-1, Mount="Surface Mount", Mouser Description="Switch DIP OFF ON SPST 8 Recessed Rocker 0.025A 24VDC Gull Wing 1.27mm SMD T/R", Number Of Circuits=8, Octopart=https://octopart.com/1-1571983-1-te+connectivity-40115518, Package=1-1571983-1, RoHS=TRUE, Standoff Height=0mm, Throw Configuration=SPST
Ud1: "No Description Available", Mfr_Name=Microchip, RefDes=RefDes, Type=Type
Ud2: library part CMP-0272-00599-3, "2.2 nV/rtHz, 18 MHz, Precision, RRO, Operational Amplifier, 4.5 to 36 V, -40 to 125 degC, 8-pin SOIC (D8), Green (RoHS & no Sb/Br)", Manufacturer="Texas Instruments", Rating=Catalog, Total Supply Voltage(Max)(+5V is 5, +/-5V is 10)=36, Total Supply Voltage(Min)(+5V is 5, +/-5V is 10)=4.5, CMRR(Min)(dB)=120, Code_JEDEC=MS-012, ComponentLink1Description="Manufacturer URL", ComponentLink1URL=http://www.ti.com/, ComponentLink2Description=Datasheet, ComponentLink2URL=http://www.ti.com/lit/ds/symlink/opa209.pdf, ComponentLink3Description="Package Specification", ComponentLink3URL=http://www.ti.com/litv/pdf/msoi002j, DatasheetVersion=SBOS426B, Eco-Plan="Green (RoHS & no Sb/Br)", GBW(Typ)(MHz)=18, IIB(Max)(pA)=4500, Iq per channel(Max)(mA)=2.5, Mounting Technology="Surface Mount", Number of Channels=1, Offset Drift(Typ)(uV/C)=1, PackageDescription="8-Pin Plastic Small Outline, Body 4.9 x 3.9 mm, Pitch 1.27 mm", PackageReference=D0008A, PackageVersion="4040047-3/M, 06/2011", Packing=TUBE, PartNumber=OPA209AID, Slew Rate(Typ)(V/us)=6.4, Sub Family="High Supply Voltage Amplifier (>=30V), Low Noise Amp (<=10nV/rtHz), Low Offset Voltage Amplifier (<=500uV), Precision Amplifier", Vio (25C)(Max)(mV)=0.15
Up2: library part CMP-09138-000077-1, "IC REG LIN POS ADJ 500MA 8LFCSP", Dropout Voltage=42mV, Input Bias Current=1nA, Max Input Voltage=6.5V, Max Operating Temperature=125°C, Max Output Current=500mA, Min Current Limit=700mA, Min Input Voltage=2.3V, Min Operating Temperature=-40°C, Min Output Voltage=1.2V, Operating Supply Current=3mA, Output Voltage=6.458V, Package Quantity=1500, Power Supply Rejection Ratio (PSRR)=60dB, Quiescent Current=2mA, Accuracy=0.75%, Lead Free="Contains Lead", Mount="Surface Mount", Number of Outputs=1, Number of Pins=8, Number of Regulators=1, Output Current=500mA, Output Type=Adjustable, Packaging="Tape and Reel", Polarity=Positive, REACH SVHC="No SVHC", RoHS Compliant=Yes
Up3 Up6 Up8: library part CMP-0482-00798-1, "Wide Range I2C Power Monitor, 12-pin SOP (MS-12), 0 to 70 degC, Pb-Free, Tape and Reel", Manufacturer="Linear Technology", ComponentLink1Description="Manufacturer URL", ComponentLink1URL=http://www.linear.com/, ComponentLink2Description=Datasheet, ComponentLink2URL=http://cds.linear.com/docs/en/datasheet/2945f.pdf, ComponentLink3Description="Package Specification", ComponentLink3URL=http://cds.linear.com/docs/en/packaging/05081668_A_MS12.pdf, Mounting Technology="Surface Mount", Number of Supplies(#)=1, PackageDescription="12-Pin Plastic MSOP, Body 4.039 x 3 mm, Pitch 0.65 mm", PackageReference=MS-12, PackageVersion="Rev. A, 05/2013", Packing="Tape and Reel", PartNumber=LTC2945CMS#TRPBF, RoHS=TRUE
Up7: library part CMP-06325-000086-1, "IC REG BOOST ADJ 750MA 8MLF", Case/Package=DFN, Max Input Voltage=10V, Max Operating Temperature=125°C, Max Output Current=750mA, Max Output Voltage=34V, Min Input Voltage=2.5V, Min Operating Temperature=-40°C, Output Current=500mA, Package Quantity=5000, Switching Frequency=1.2MHz, Height=0.85mm, Lead Free="Lead Free", Length=2mm, Min Output Voltage=2.5V, Min Supply Voltage=2.5V, Mount="Surface Mount", Number of Outputs=1, Number of Pins=8, Output Configuration=Positive, Output Type=Adjustable, Output Voltage=34V, Packaging="Cut Tape", Reach SVHC Compliant=Yes, RoHS Compliant=Yes, Series=-, Switching Frequency-Max=1.2MHz, Synchronous Rectifier=No, Topology=Boost, Width=2mm

## Nets (pads, with @x,y where several pads share a name; then routed paths per layer and width w, separated by ;. In a path a pad name is that pad's centre, name@x,y a point inside that pad or via, vN(x,y) a via of type N, cw(c..) or ccw(c..) an arc to the next point about the centre after c; other vN are vias at no path point)
+20: Cd5.1 Cd11.1 Cd12.1 Jd2.4 Rd22.2 Ud2.7
DAC1: Ud1.23 Ud2.3
GND: Cd1.2 Cd2.2 Cd3.2 Cd4.2 Cd5.2 Cd6.2 Cd7.2 Cd8.2 Cd9.2 Cd10.2 Cd11.2 Cd12.2 Cp9.2 Cp12.2 Cp13.2 Cp15.2 Cp16.2 Cp17.2 Cp18.2 Cp19.2 Cp20.2 Cp21.2 Cp22.2 Cp23.2 Cp24.2 Cp25.2 Cr3.2 Cr4.2 Cr6.1 Cr7.1 Cr8.1 Jd1.3 Jd2.2 Jr3.2 Jr3.3 Jr3.4 Jr3.5 LEDd5.1 LEDd6.1 Pp1.2 Pp2.2 Pp2.4 Pp2.6 Pp3.6 Rd9.1 Rp16.2 Rp22.2 Rr1.1 Rr03.1 SWd1.16 SWd2.15 SWd3.14 SWd4.13 SWd5.12 SWd6.11 SWd7.10 SWd8.9 Ud1.5 Ud1.16 Ud1.21 Ud1.29 Ud1.42 Ud2.4 Up2.6 Up2.9 Up3.3 Up3.5 Up3.6 Up6.3 Up6.4 Up6.5 Up6.6 Up7.4 Up7.8 Up7.9 Up8.4 Up8.5 Up8.6
"LED1 - DAC Output": LEDd1.1 Ud1.48
"LED2 - Sensor 1": LEDd2.1 Ud1.47
"LED3 - Sensor 2": LEDd3.1 Ud1.46
"LED4 - Sensor 3": LEDd4.1 Ud1.45
MCLR: Jd1.1 Ud1.4
Net_2: Rr01.2
Net_6: Cr7.2 Cr8.2
Net_10: 
NetCp12_1: Cp12.1 Rp6.2 Rp7.1 Up2.1 Up2.2 Up3.1 Up3.12
NetCp13_1: Cp13.1 Up2.4
NetCp16_1: Cp16.1 Cp17.1 Rp14.1 Up6.1 Up6.12
NetCp18_1: Cp18.1 Cp19.1 Rp15.2
NetCp20_1: Cp20.1
NetCp21_1: Cp21.1 Up6.2
NetCp23_1: Cp23.1 Cp24.1 Rp20.1 Rp21.1 Up7.1 Up8.1 Up8.12
NetCp25_1: Cp25.1 Up8.2 Up8.3
NetCr1_1: Cr1.1 Rr02.2
NetCr1_2: Cr1.2
NetCr2_1: Cr2.1
NetCr2_2: Cr2.2 Jr3.1
NetCr3_1: Cr3.1 Cr4.1 Cr6.2 Rr4.2
NetLEDd1_2: LEDd1.2 Rd12.1
NetLEDd2_2: LEDd2.2 Rd13.1
NetLEDd3_2: LEDd3.2 Rd14.1
NetLEDd4_2: LEDd4.2 Rd15.1
NetLEDd5_2: LEDd5.2 Rd22.1
NetLEDd6_2: LEDd6.2 Rd23.1
NetLp2_2: Lp2.2
NetLp3_2: Lp3.2
NetLp4_2: Lp4.2 Up7.7
NetPp3_1: Pp3.1 Rp10.2 Up6.7
NetPp3_2: Pp3.2 Rp3.2 Rp11.2 Rp18.2 Up3.8 Up3.9 Up6.8 Up6.9 Up8.8 Up8.9
NetPp3_3: Pp3.3 Rp2.2 Up3.10
NetPp3_4: Pp3.4 Rp12.2 Up6.10
NetPp3_5: Pp3.5 Rp19.2 Up8.10
"NetRF Amp_1": Rr4.1
"NetRF Amp_6": Rr1.2
NetRp5_2: Rp5.2 Rp17.2 Up3.7 Up8.7
NetRp6_1: Rp6.1 Up2.3
NetRp8_1: Rp8.1
NetRp8_2: Rp8.2 Up2.5 Up2.7 Up2.8
NetRp13_1: Rp13.1
NetRp13_2: Rp13.2 Rp16.1
NetRp15_1: Rp15.1
NetRp20_2: Rp20.2 Rp22.1 Up7.6
NetRr01_1: Rr01.1 Rr02.1 Rr03.2
NetUp3_2: Up3.2 Up3.4
OpAmpNeg: Rd9.2 Rd10.1 Ud2.2
OpAmpOut: Rd10.2 Rd11.1 Ud2.6
OpAmpRCOut: Cd6.1 Rd11.2
PGC1: Jd1.5 Ud1.13
PGD1: Jd1.4 Ud1.14
SW1-1: Rd1.2 SWd1.1 Ud1.41
SW1-2: Rd2.2 SWd2.2 Ud1.40
SW1-3: Rd3.2 SWd3.3 Ud1.39
SW1-4: Rd4.2 SWd4.4 Ud1.38
SW1-5: Rd5.2 SWd5.5 Ud1.35
SW1-6: Rd6.2 SWd6.6 Ud1.33
SW1-7: Rd7.2 SWd7.7 Ud1.28
SW1-8: Rd8.2 SWd8.8 Ud1.27
VCC: Cd1.1 Cd2.1 Cd3.1 Cd4.1 Cd7.1 Cd8.1 Cd9.1 Cd10.1 Cp15.1 Cp22.1 Jd1.2 Jd2.1 Lp2.1 Lp3.1 Lp4.1 Pp1.1 Rd1.1 Rd2.1 Rd3.1 Rd4.1 Rd5.1 Rd6.1 Rd7.1 Rd8.1 Rd12.2 Rd13.2 Rd14.2 Rd15.2 Rd23.2 Ud1.6 Ud1.15 Ud1.22 Ud1.26 Ud1.43 Up7.2 Up7.3
Vdigital: Pp2.1 Rp2.1 Rp3.1 Rp5.1 Rp7.2 Rp10.1 Rp11.1 Rp12.1 Rp17.1 Rp18.1 Rp19.1 Up3.11
Vopamp: Pp2.5 Rp21.2 Up8.11
Vout: Pp2.3 Rp14.2 Up6.11
pads on no net: Cp5.1 Cp5.2 Cp9.1 Cp10.1 Cp10.2 Cp11.1 Cp11.2 Cp14.1 Cp14.2 Jd1.6 Jd2.3 Rp9.1 Rp9.2 SWd1.2 SWd1.3 SWd1.4 SWd1.5 SWd1.6 SWd1.7 SWd1.8 SWd1.9 SWd1.10 SWd1.11 SWd1.12 SWd1.13 SWd1.14 SWd1.15 SWd2.1 SWd2.3 SWd2.4 SWd2.5 SWd2.6 SWd2.7 SWd2.8 SWd2.9 SWd2.10 SWd2.11 SWd2.12 SWd2.13 SWd2.14 SWd2.16 SWd3.1 SWd3.2 SWd3.4 SWd3.5 SWd3.6 SWd3.7 SWd3.8 SWd3.9 SWd3.10 SWd3.11 SWd3.12 SWd3.13 SWd3.15 SWd3.16 SWd4.1 SWd4.2 SWd4.3 SWd4.5 SWd4.6 SWd4.7 SWd4.8 SWd4.9 SWd4.10 SWd4.11 SWd4.12 SWd4.14 SWd4.15 SWd4.16 SWd5.1 SWd5.2 SWd5.3 SWd5.4 SWd5.6 SWd5.7 SWd5.8 SWd5.9 SWd5.10 SWd5.11 SWd5.13 SWd5.14 SWd5.15 SWd5.16 SWd6.1 SWd6.2 SWd6.3 SWd6.4 SWd6.5 SWd6.7 SWd6.8 SWd6.9 SWd6.10 SWd6.12 SWd6.13 SWd6.14 SWd6.15 SWd6.16 SWd7.1 SWd7.2 SWd7.3 SWd7.4 SWd7.5 SWd7.6 SWd7.8 SWd7.9 SWd7.11 SWd7.12 SWd7.13 SWd7.14 SWd7.15 SWd7.16 SWd8.1 SWd8.2 SWd8.3 SWd8.4 SWd8.5 SWd8.6 SWd8.7 SWd8.10 SWd8.11 SWd8.12 SWd8.13 SWd8.14 SWd8.15 SWd8.16 Ud1.1 Ud1.2 Ud1.3 Ud1.7 Ud1.8 Ud1.9 Ud1.10 Ud1.11 Ud1.12 Ud1.17 Ud1.18 Ud1.19 Ud1.20 Ud1.24 Ud1.25 Ud1.30 Ud1.31 Ud1.32 Ud1.34 Ud1.36 Ud1.37 Ud1.44 Ud2.1 Ud2.5 Ud2.8 Up7.5

## Text inside footprints (layer, text, board x,y; h text height)
Pp2: Top Overlay "6" at 28873.07,1875.04 h40 r90; Top Overlay "1" at 28873.07,1385.28 h40 r90
Pp3: Top Overlay "6" at 26588.07,1875.04 h40 r90; Top Overlay "1" at 26588.07,1385.28 h40 r90
Ud1: Top 3D Body "*" at 14044.5,1843.11 h50; Top Overlay "*" at 13951.5,1858.11 h50